# Altium PCB AC-DC-Supply-M1.PcbDoc
Units mil, origin at the board's own origin, x right, y up, seen from the top; angles counter-clockwise.
Board outline 4921.26 x 3937.01 mil, 2 copper layers (Top, Bottom); 58 components, 30 nets, 139 pads, 118 vias.
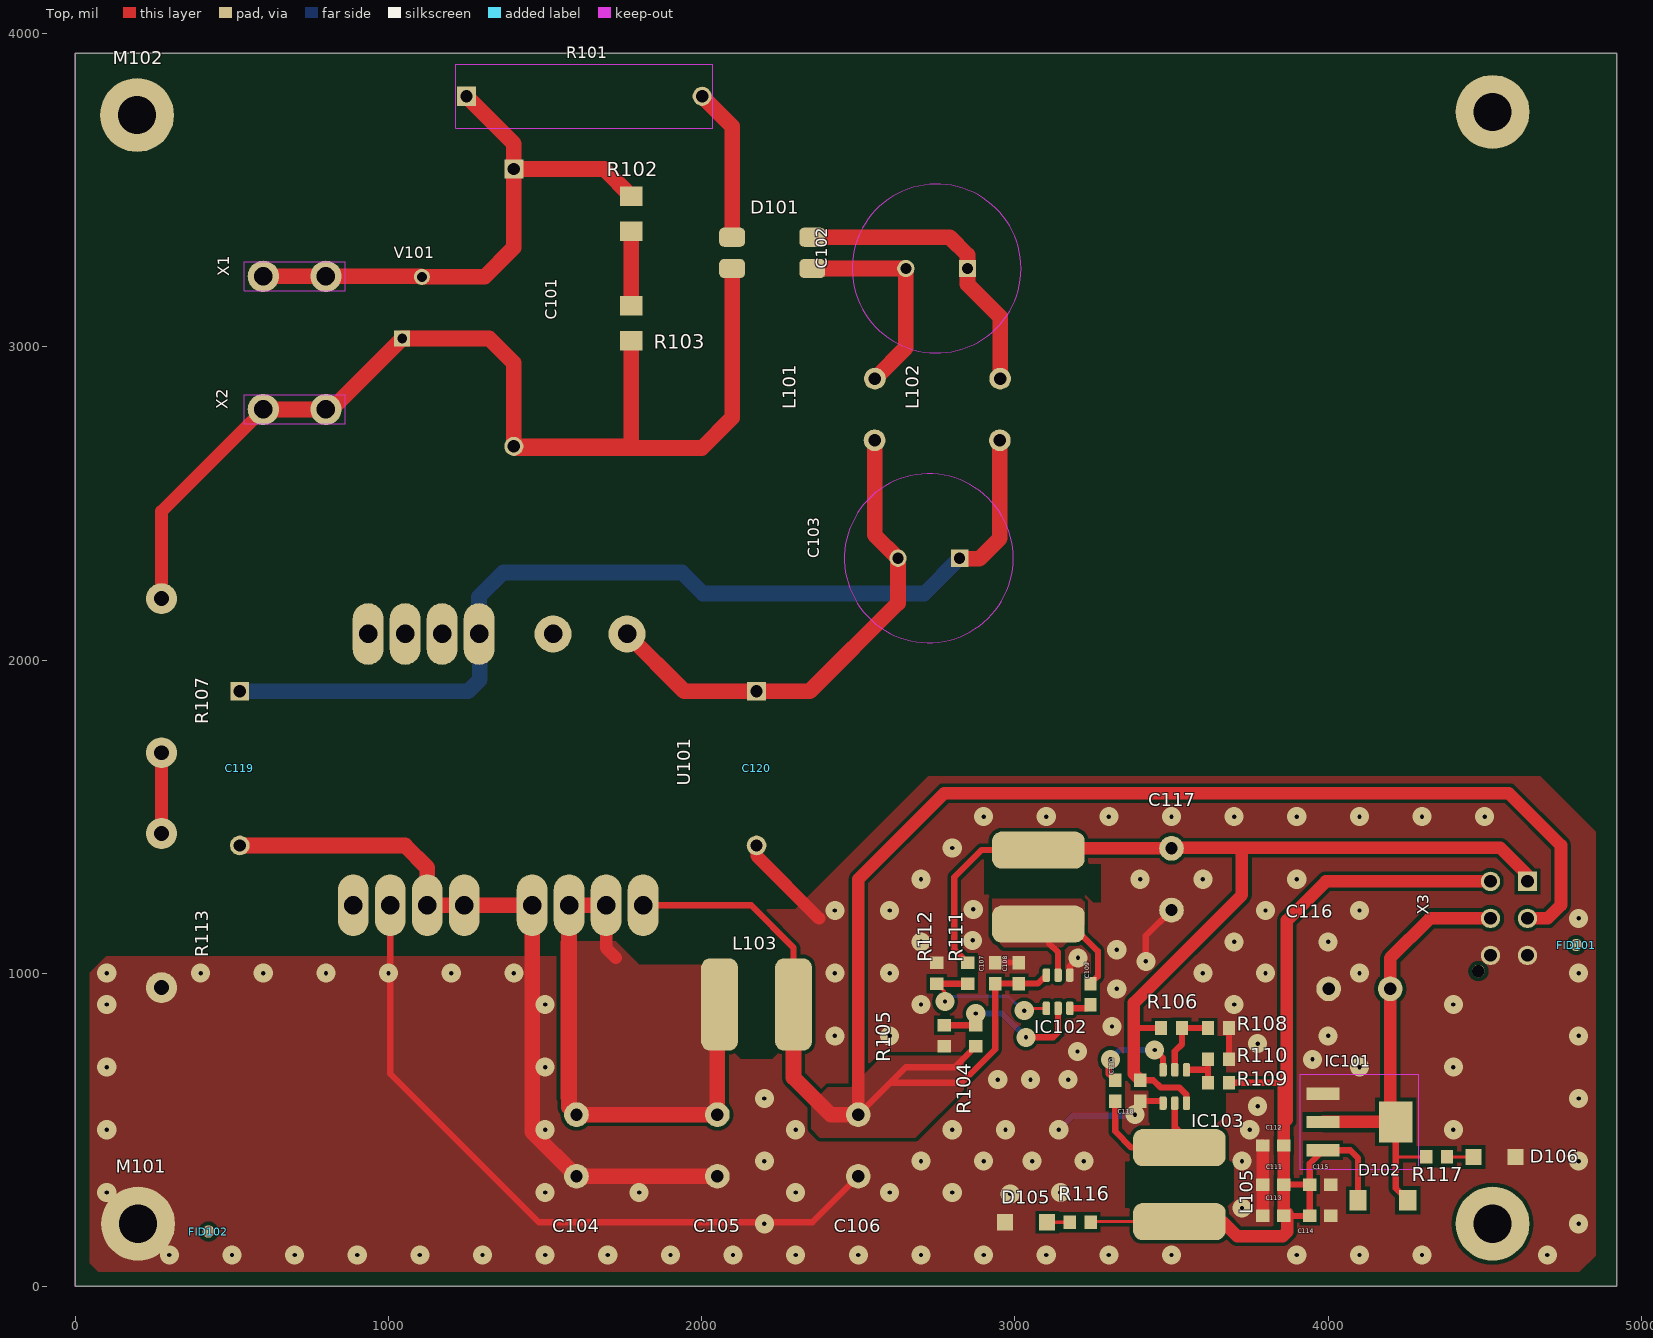
[diagram p0: Top view]
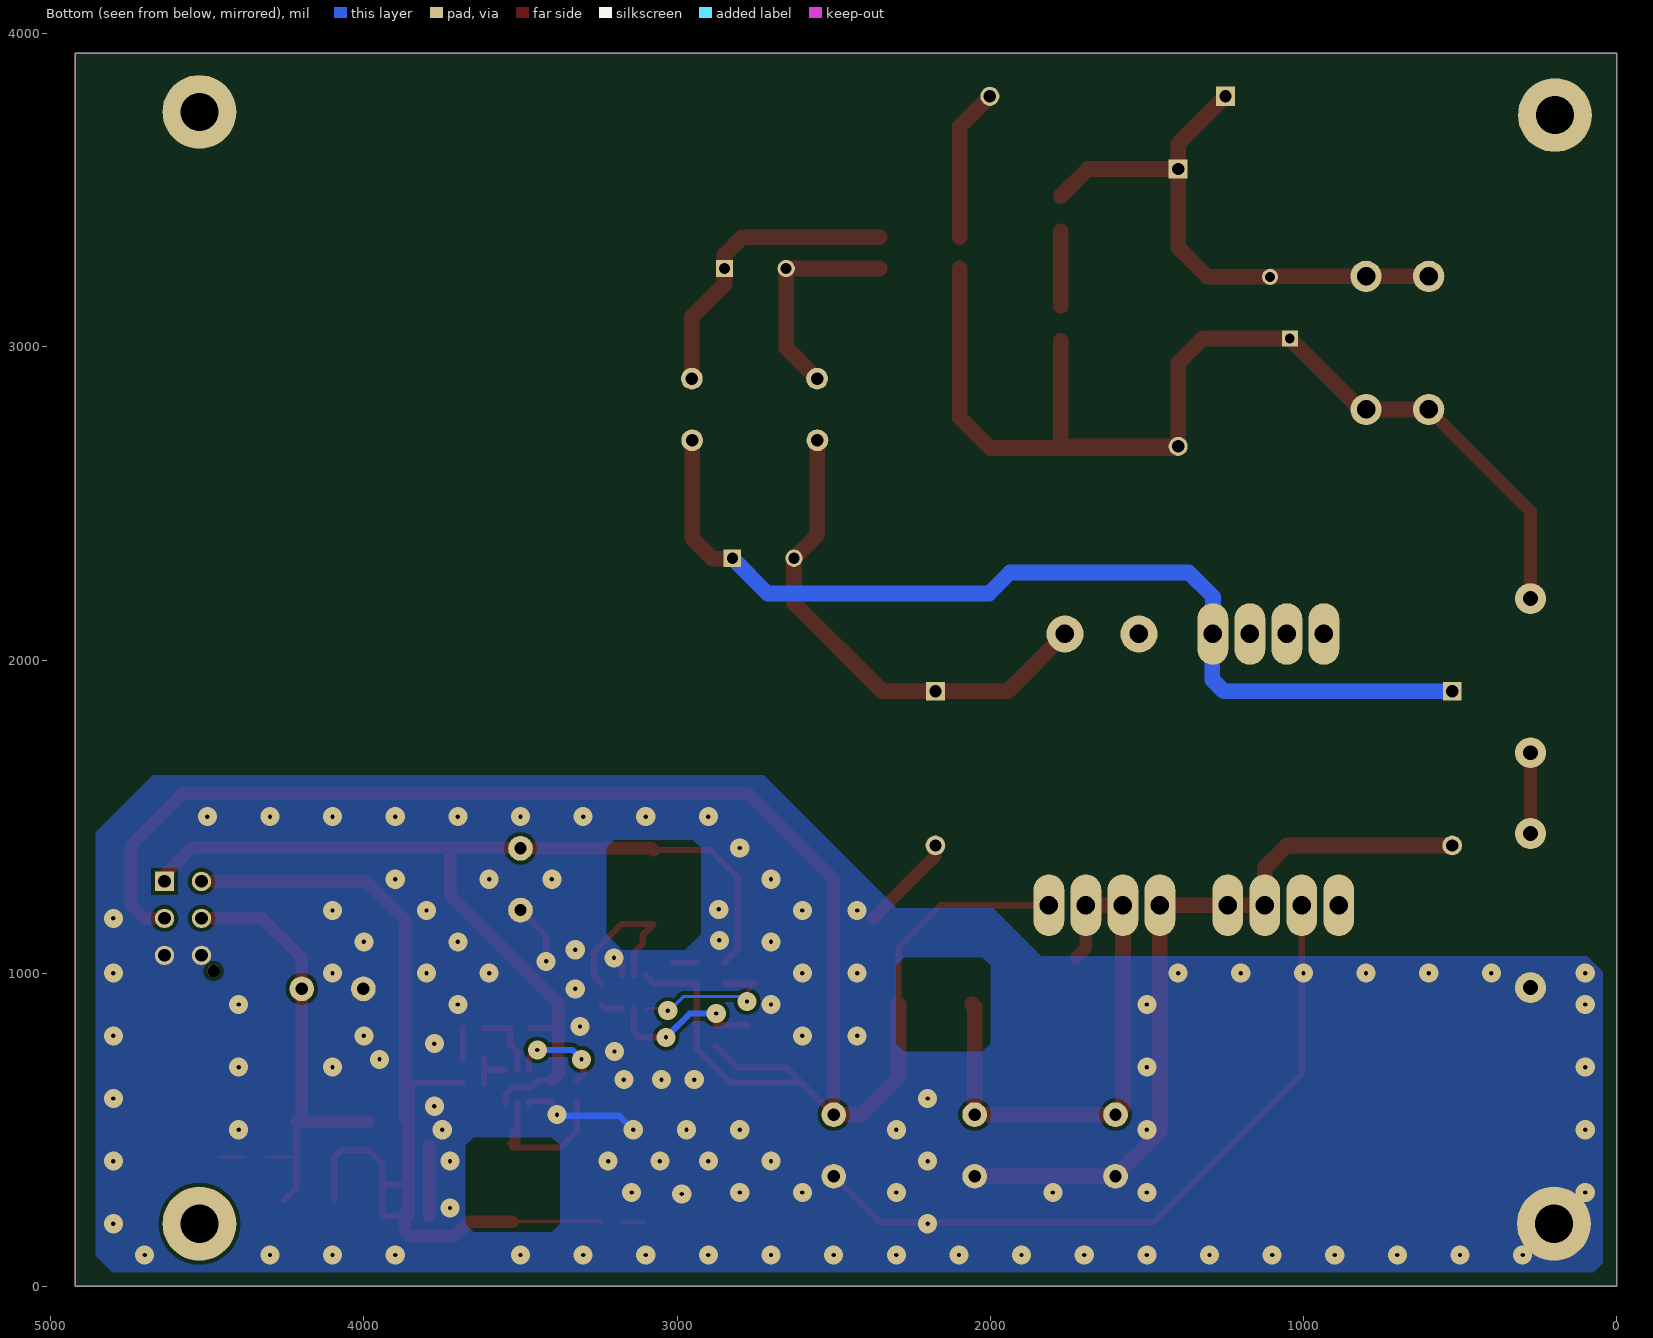
[diagram p1: Bottom view, seen from below]

## Layer stack, top to bottom
Top Solder: solder mask 0.4, Solder Resist, Dk 3.5
Top: signal copper 2.7559
Dielectric 1: dielectric 12.6, FR-4, Dk 4.8
Bottom: signal copper 2.7559
Bottom Solder: solder mask 0.4, Solder Resist, Dk 3.5

## Board outline
0,0 4921.26,0 4921.26,3937.01 0,3937.01

## Design rules (kind name [scope] priority, off if disabled: settings)
BoardOutlineClearance mdCopperDimension [All] p1: gap=10 ignorepadtopadclearanceinfootprint=FALSE except(0: Arc-SplitContinuation Track-SplitContinuation SMDPad-SplitContinuation THPad-SplitContinuation Via-SplitContinuation Fill-SplitContinuation Poly-SplitContinuation Region-SplitContinuation Text-SplitContinuation; 40: Poly-OutlineEdge Poly-CavityEdge Poly-CutoutEdge Poly-SplitBarrior)
Clearance "Clearance (Same Net)" [All] p1: gap=11.81 ignorepadtopadclearanceinfootprint=FALSE except(0: SMDPad-SMDPad SMDPad-THPad SMDPad-Via; 15.75: Track-Via THPad-Via Via-Via)
Clearance [All] p2: gap=11.81 ignorepadtopadclearanceinfootprint=FALSE except(0: Arc-Poly Track-Poly SMDPad-Poly THPad-Poly Via-Poly Fill-Poly Poly-Poly Poly-Region Poly-Text; 15.75: Track-Via THPad-Via Via-Via; 40: Poly-Hole)
HoleSize [All] p1: absolutevalues=TRUE maxlimit=100000 minlimit=11.81 maxpercent=80.000 minpercent=20.000
HoleToHoleClearance mdDrill [All] p1: gap=6 allowstackedmicrovias=TRUE
PasteMaskExpansion mlMinCreamFrame [All] p1: expansion=0
PolygonConnect PolygonConnect_For_PolygonThermal_OFF [InPolygonClass('PolygonThermal_OFF')] p1: connectstyle=Direct reliefconductorwidth=10 reliefentries=4 polygonreliefangle="90 Angle" airgapwidth=10
PolygonConnect ThermalVias [IsVia] p2: connectstyle=Direct reliefconductorwidth=10 reliefentries=4 polygonreliefangle="90 Angle" airgapwidth=10
PolygonConnect [All] p3: connectstyle=Relief reliefconductorwidth=10 reliefentries=4 polygonreliefangle="90 Angle" airgapwidth=10
RoutingVias [All] p1: holewidth=11.81 width=59.05 viastyle="Through Hole" minholewidth=11.81 minwidth=59.05 maxholewidth=100 maxwidth=100
SolderMaskExpansion mlMinStopFrame [All] p1: expansion=4
Width [All] p1: maxlimit=10000 minlimit=7.87 preferedwidth=7.87
27 further rules are at their usual default settings.

## Classes and differential pairs
polygon class PolygonThermal_OFF: Polygon_1_Net_10_AC-DC_SUPPLY:N$9 Polygon_1_Net_10_AC-DC_SUPPLY:N$11 Polygon_1_Net_GND Polygon_1_Net_V_24V0 Polygon_2_Net_GND
polygon class Isolate_0: Polygon_1_Net_10_AC-DC_SUPPLY:N$9 Polygon_1_Net_10_AC-DC_SUPPLY:N$11 Polygon_1_Net_GND Polygon_1_Net_V_24V0 Polygon_2_Net_GND

## Components (designator, comment, footprint, x,y, rotation, side; value= is the part's Value field where it differs from the comment)
C101 "" R49AN347050B1M 1400,3125 r270 top
C102 "" RADIAL_D13.0P5.0H25.0 2750,3250 r180 top
C103 "" RADIAL_D13.0P5.0H25.0 2725,2325 r180 top
C104 "" CAPACITOR-ELKO-RM5-10X16 1600,450 r270 top
C105 "" CAPACITOR-ELKO-RM5-10X16 2050,450 r270 top
C106 "" CAPACITOR-ELKO-RM5-10X16 2500,450 r270 top
C107 "" 0603 2937.6,1000.39 r90 top
C108 "" 0603 3012.6,1000.39 r90 top
C109 "" 0603 3241.34,933.07 r90 top
C110 "" 0603 3320,625 r270 top
C111 "" 0603 3825,325 r0 top
C112 "" 0603 3825,450 r0 top
C113 "" 0603 3825,225 r0 top
C114 "" 0603 3975,225 r180 top
C115 "" 0603 3975,325 r0 top
C116 "" CAPACITOR-ELKO-RM5-10X16 4100,950 r180 top
C117 "" CAPACITOR-ELKO-RM5-10X16 3500,1300 r270 top
C118 "" 0603 3400,625 r90 top
C119 "" CAP-P12.5-H15-W4-D1 525,1900 r270 top
C120 "" CAP-P12.5-H15-W4-D1 2175,1900 r270 top
D101 "MB10S" SOIC4W 2225,3300 r180 top
D102 "" SMA_STTH1L06A 4175,275 r0 top
D105 "" SMD1206-LED 3035.43,204.72 r180 top
D106 "" SMD1206-LED 4531.5,413.39 r0 top
FID101 "" FIDUCIAL 4792.32,1089.96 r0 top
FID102 "" FIDUCIAL 425,175 r0 top
IC101 "" SOT223_LD1117S33TR 4100,525 r0 top
IC102 "" SOT23-6 3137.8,940.94 r180 top
IC103 "" SOT23-6 3510.43,638.15 r0 top
L101 "" THTINDUCTOR8MM7 2550,2800 r270 top
L102 "" THTINDUCTOR8MM7 2950,2800 r270 top
L103 "" SRN8040TA-220M 2175,900 r0 top
L104 "" SRN8040TA-220M 3075,1275 r90 top
L105 "" SRN8040TA-220M 3525,325 r270 top
M101 "" PCB_SCREW_M3_POWER 200,200 r0 top
M102 "" PCB_SCREW_M3_POWER 196.85,3740.16 r0 top
M103 "" PCB_SCREW_M3_POWER 4525,3750 r0 top
M104 "" PCB_SCREW_M3_POWER 4525,200 r0 top
R101 "" ERG-2SJ390V_0 1625,3800 r0 top
R102 "" R1206 1775,3425 r90 top
R103 "" R1206 1775,3075 r90 top
R104 "" R0603 2875,800 r270 top
R105 "" R0603 2775,800 r90 top
R106 "1K 1 %" R0603 3500,825 r180 top
R107 "RNF12FTD10M0" RES-RM12.5-VR37 275,1950 r270 top
R108 "" R0603 3650,825 r180 top
R109 "" R0603 3650,650 r180 top
R110 "" R0603 3650,725 r0 top
R111 "" R0603 2850,1000 r270 top
R112 "" R0603 2750,1000 r270 top
R113 "RNF12FTD10M0" RES-RM12.5-VR37 275,1200 r270 top
R116 "" R0603 3208.66,204.72 r180 top
R117 "" R0603 4346.46,413.39 r0 top
U101 "" BPM2417SJ 1350,1650 r270 top
V101 "" EPCOS_B72205S0271K101_0 1075,3125 r90 top
X1 "" TE_726386-2_MODIFIED 700,3225 r180 top
X2 "" TE_726386-2_MODIFIED 700,2800 r180 top
X3 "" MOLEX_206832-0601 4550,1175 r90 top

## Footprints (in the part's own frame and the unit in brackets; to place one, negate y for a bottom-side part, rotate by r counter-clockwise, add the part's x,y. Pads: shape width x height; smd on the part's side, far side on the other; paste and mask are expansions set on the pad)
0603 [mm] "0603"
  rect 1.1x1 smd: 1(-0.85,0) 2(0.85,0)
  body extent -1.4,-0.5 1.4,0.5, height 3.81
BPM2417SJ [mm] "BPM2417SJ"
  round 3 / inner round 1.524 / far side round 3 hole 1.5: 1(-11,10.45) 2(-11,4.45)
  oval 5x2.5 / inner round 1.524 / far side oval 5x2.5 hole 1.5: 3(-11,-1.55) 4(-11,-4.55) 5(-11,-7.55) 6(-11,-10.55) 07(11,-11.75) 08(11,-8.75) 09(11,-5.75) 10(11,-2.75) 11(11,2.75) 12(11,5.75) 13(11,8.75) 14(11,11.75)
  body extent -11.77,-12.52 11.77,12.52, height 1.27
CAP-P12.5-H15-W4-D1 [mm] "CAP-P12.5-H15-W4-D1"
  rect 1.508x1.508 / inner rect 1.524x1.524 / far side rect 1.508x1.508 hole 1: P$1(0,0)
  round 1.6 / inner round 1.524 / far side round 1.6 hole 1: P$2(12.5,0)
  body extent -0.76,-0.77 13.27,0.77, height 1.27
CAPACITOR-ELKO-RM5-10X16 [mm] "CAPACITOR-ELKO-RM5-10X16"
  round 2 / inner round 1.524 / far side round 2 hole 1: 1(-2.5,0) 2(2.5,0)
  body extent -3.27,-0.77 3.27,0.77, height 1.27
EPCOS_B72205S0271K101_0 [mil] "EPCOS_B72205S0271K101_0"
  rect 51.18x51.18 / inner rect 60x60 / far side rect 51.18x51.18 hole 31.5: 1(-98.43,31.5)
  round 51.18 / inner round 60 / far side round 51.18 hole 31.5: 2(98.43,-31.5)
  body extent -141,-88 141,88, height 150
ERG-2SJ390V_0 [mm] "ERG-2SJ390V_0"
  rect 1.55x1.55 / inner rect 1.524x1.524 / far side rect 1.55x1.55 hole 1: 1(-9.555,0)
  round 1.55 / inner round 1.524 / far side round 1.55 hole 1: 2(9.555,0)
  Top keep-out lines w0.1: -10.43,-2.6 10.43,-2.6 10.43,2.6 -10.43,2.6 -10.43,-2.6
  body extent -10.48,-2.65 10.48,2.65, height 3.81
FIDUCIAL [mm] "FIDUCIAL"
  rrect100% 1x1 smd: P$1(0,0)
  body extent -0.51,-0.51 0.51,0.51, height 1.27
MOLEX_206832-0601 [mil] "MOLEX_206832-0601"
  rect 61.81x61.81 / inner rect 60x60 / far side rect 61.81x61.81 hole 40.16: 1(118.11,-86.61)
  round 61.81 / inner round 60 / far side round 61.81 hole 40.16: 2(118.11,31.5) 3(0,-86.61) 4(0,31.5) 5(-118.11,-86.61) 6(-118.11,31.5)
  round 40.16 hole 40.16 unplated: MH1(-168.5,70.08)
  body extent -202,-176 202,176, height 150
PCB_SCREW_M3_POWER [mm] "PCB_SCREW_M3_POWER"
  round 6 / inner round 1.524 / far side round 6 hole 3.1: 1(0,0)
  body extent -1.56,-1.56 1.56,1.56, height 1.27
R49AN347050B1M [mm] "R49AN347050B1M"
  rect 1.55x1.55 / inner rect 1.524x1.524 / far side rect 1.55x1.55 hole 1: 1(-11.25,0)
  round 1.55 / inner round 1.524 / far side round 1.55 hole 1: 2(11.25,0)
  body extent -13.48,-5.18 13.48,5.18, height 3.81
R0603 [mm] "R0603"
  rect 1x1.1 smd: 1(-0.85,0) 2(0.85,0)
  body extent -1.35,-0.55 1.35,0.55, height 3.81
R1206 [mil] "R1206"
  rect 62.99x70.98 smd: 1(-55.98,0) 2(55.98,0)
  body extent -87,-35 87,35, height 150
RADIAL_D13.0P5.0H25.0 [mil] "RADIAL_D13.0P5.0H25.0"
  rect 55.12x55.12 / inner rect 60x60 / far side rect 55.12x55.12 hole 35.43: 1(-98.43,0)
  round 55.12 / inner round 60 / far side round 55.12 hole 35.43: 2(98.43,0)
  Top keep-out circle w0: c0,0 r269.69
  body extent -270,-270 270,270, height 150
RES-RM12.5-VR37 [mil] "RES-RM12.5-VR37"
  round 98.43 / inner round 60 / far side round 98.43 hole 47.24: 1(-246.06,0) 2(246.06,0)
  body extent -276,-30 276,30, height 50
SMA_STTH1L06A [mm] "SMA_STTH1L06A"
  rect 1.4x1.64 smd: 1(-2.015,0) 2(2.015,0)
  body extent -2.72,-1.53 2.72,1.53, height 3.81
SMD1206-LED [mil] "SMD1206-LED"
  rect 51.18x51.18 smd: 1(-66.93,0) 2(66.93,0)
  body extent -93,-43 93,43, height 150
SOIC4W [mil] "SOIC4W"
  rrect50% 82.68x61.02 smd: 1(-127.95,50) 2(-127.95,-50) 3(127.95,-50) 4(127.95,50)
  body extent -170,-109 170,109, height 150
SOT23-6 [mm] "SOT23-6"
  rrect50% 0.6x1.1 smd: 1(-0.95,-1.35) 2(0,-1.35) 3(0.95,-1.35) 4(0.95,1.35) 5(0,1.35) 6(-0.95,1.35)
  body extent -1.26,-1.91 1.26,1.91, height 1.27
SOT223_LD1117S33TR [mm] "SOT223_LD1117S33TR"
  rect 2.7x1 smd: 1(-2.95,2.3) 2(-2.95,0) 3(-2.95,-2.3)
  rect 2.7x3.3 smd: 4(2.95,0)
  Top keep-out lines w0.1: -4.8,-3.85 4.8,-3.85 4.8,3.85 -4.8,3.85 -4.8,-3.85
  body extent -4.85,-3.9 4.85,3.9, height 3.81
SRN8040TA-220M [mm] "SRN8040TA-220M"
  rrect50% 3x7.5 smd: 1(-3,0) 2(3,0)
  body extent -4.51,-3.76 4.51,3.76, height 1.27
TE_726386-2_MODIFIED [mil] "TE_726386-2_MODIFIED"
  round 100 / inner round 60 / far side round 100 hole 59.06: 1(-100,0) 1-2(100,0)
  Top keep-out lines w3.94: 161.42,46.26 161.42,-46.26 -161.42,-46.26 -161.42,46.26 161.42,46.26
  body extent -164,-48 164,48, height 150
THTINDUCTOR8MM7 [mm] "THTINDUCTOR8MM7"
  round 1.762 / inner round 1.524 / far side round 1.762 hole 1: 1(-2.5,0.075) 2(2.5,0.05)
  body extent -3.27,-0.72 3.27,0.84, height 1.27

## Part data
C101: library part R49AN347050B1M, PackageName=R49AN347050B1M
C102 C103: library part RADIAL_D13.0P5.0H25.0, PackageName=RADIAL_D13.0P5.0H25.0
C104 C105 C106 C116 C117: library part CAPACITOR-ELKO-RM5-10X16, PackageName=CAPACITOR-ELKO-RM5-10X16
C107 C108 C109 C110 C111 C112 C113 C114 C115 C118: library part 0603, PackageName=0603
C119 C120: library part CAP-P12.5-H15-W4-D1, PackageName=CAP-P12.5-H15-W4-D1
D101: library part SOIC4W, PackageName=SOIC4W
D102: library part SMA_STTH1L06A, PackageName=SMA_STTH1L06A
D105 D106: library part SMD1206-LED, PackageName=SMD1206-LED
FID101 FID102: library part FIDUCIAL, PackageName=FIDUCIAL
IC101: library part SOT223_LD1117S33TR, PackageName=SOT223_LD1117S33TR
IC102 IC103: library part SOT23-6, PackageName=SOT23-6
L101 L102: library part THTINDUCTOR8MM7, PackageName=THTINDUCTOR8MM7
L103 L104 L105: library part SRN8040TA-220M, PackageName=SRN8040TA-220M
M101 M102 M103 M104: library part PCB_SCREW_M3_POWER, PackageName=PCB_SCREW_M3_POWER
R101: library part ERG-2SJ390V_0, PackageName=ERG-2SJ390V_0
R102 R103: library part R1206, PackageName=R1206
R104 R105 R106 R108 R109 R110 R111 R112 R116 R117: library part R0603, PackageName=R0603
R107 R113: library part RES-RM12.5-VR37, PackageName=RES-RM12.5-VR37
U101: library part BPM2417SJ, PackageName=BPM2417SJ
V101: library part EPCOS_B72205S0271K101_0, PackageName=EPCOS_B72205S0271K101_0
X1 X2: library part TE_726386-2_MODIFIED, PackageName=TE_726386-2_MODIFIED
X3: library part MOLEX_206832-0601, PackageName=MOLEX_206832-0601

## Via types
v1: diameter 61.02/61.02 (per signal layer), hole 13.78, Top to Bottom, tented both sides, 118 vias

## Nets (pads, with @x,y where several pads share a name; then routed paths per layer and width w, separated by ;. In a path a pad name is that pad's centre, name@x,y a point inside that pad or via, vN(x,y) a via of type N, cw(c..) or ccw(c..) an arc to the next point about the centre after c; other vN are vias at no path point)
10_AC-DC_SUPPLY:N$1: IC102.4 R111.2 R112.2 | length 522
  Top w10: R112.2 2775.59,940.94 2775.59,910.63 v1(2776.77,909.45) ; v1(3029.94,880.33) 3037.4,887.8 IC102.4
  Top w20: R112.2 R111.2
  Bottom w10: v1(2776.77,909.45) 2792.52,925.2 2980.32,925.2 3027.56,877.95 v1(3029.94,880.33)
10_AC-DC_SUPPLY:N$2: R102.1 R103.2 | length 238
  Top w50: R103.2 R102.1
10_AC-DC_SUPPLY:N$3: R107.2 R113.1 | length 257.9
  Top w40: R113.1 R107.2
10_AC-DC_SUPPLY:N$4: D101.3 R101.2 | length 489.7
  Top w50: R101.2 2097.05,3704.13 D101.3
10_AC-DC_SUPPLY:N$5: C102.2 D101.1 L101.1 | length 691
  Top w50: D101.1 C102.2 2651.57,2997.05 L101.1
10_AC-DC_SUPPLY:N$6: C102.1 D101.2 L102.1 | length 957.1
  Top w50: D101.2 2791.73,3350 2848.43,3293.31 C102.1 2848.43,3200 2952.95,3095.47 L102.1
10_AC-DC_SUPPLY:N$7: C103.2 C120.P$1 L101.2 U101.1 | length 1608.4
  Top w50: U101.1 1944.49,1900 C120.P$1 2344.88,1900 2626.57,2181.69 C103.2 2551.97,2399.61 L101.2
10_AC-DC_SUPPLY:N$8: C103.1 C119.P$1 L102.2 U101.3 | length 3158.1
  Top w50: C103.1 2825.59,2322.83 2885.83,2322.83 2951.97,2388.98 L102.2
  Bottom w50: C119.P$1 1254.33,1900 1291.34,1937.01 1291.34,2080.71 U101.3 1288.98,2202.36 1366.14,2279.53 1937.01,2279.53 2003.94,2212.6 2711.02,2212.6 C103.1
10_AC-DC_SUPPLY:N$9: C109.2 IC102.2 | length 527.8
  Top w20: IC102.2 3137.8,1066.69 3110,1094.49 3110,1121.89 3075,1156.89 3177.76,1156.89 3264.96,1069.69 3264.96,990.16 C109.2
10_AC-DC_SUPPLY:N$10: IC102.5 R104.1 R105.2 | length 515.1
  Top w20: R105.2 R104.1 v1(2875,871.06) ; v1(3035.43,795.28) 3122.05,795.28 3137.8,811.02 IC102.5
  Bottom w20: v1(2875,871.06) 2959.65,871.06 v1(3035.43,795.28)
10_AC-DC_SUPPLY:N$11: C104.1 C105.1 L103.1 U101.12 U101.13 | length 1780.4
  Top w40: U101.13 1694.49,1080.51 1725,1050
  Top w50: U101.13 U101.12 1576.38,572.05 C104.1 C105.1 2050,893.11 L103.1
10_AC-DC_SUPPLY:N$12: C109.1 IC102.6 | length 71
  Top w20: IC102.6 3229.53,887.8 C109.1
10_AC-DC_SUPPLY:N$13: C110.2 IC103.2 L105.1 | length 544.5
  Top w10: L105.1 L105.1@3540,458.11
  Top w20: C110.2 3320,495 3371.89,443.11 L105.1 3525,495.43 3510.43,510 ; L105.1@3510.43,457.68 3510.43,510 ; IC103.2 3510.43,510
10_AC-DC_SUPPLY:N$15: IC103.4 R109.2 R110.1 | length 144.2
  Top w20: IC103.4 3615.24,691.3 3616.54,690 ; R109.2 3616.54,690 ; R110.1 3616.54,690
10_AC-DC_SUPPLY:N$16: IC103.5 R106.1 R108.2 | length 226.3
  Top w20: IC103.5 3510.43,750.43 3533.46,773.46 R106.1 R108.2
10_AC-DC_SUPPLY:N$17: D105.1 R116.2 | length 72.8
  Top w10: D105.1 R116.2
10_AC-DC_SUPPLY:N$19: D106.1 R117.2 | length 84.6
  Top w10: R117.2 D106.1
10_AC-DC_SUPPLY:N$21: C110.1 IC103.6 | length 305.4
  Top w20: v1(3305,725) 3300,720 3300,678.46 C110.1 ; v1(3446.26,755) 3473.03,728.23 IC103.6
  Bottom w20: v1(3305,725) 3335,755 v1(3446.26,755)
COIL2-CUTOUT: 
COIL_CUTOUT: 
COIL_CUTOUT_BOT: 
CUTOUT02: 
CUTOUT_COIL3: 
GND: C104.2 C105.2 C106.2 C107.2 C108.2 C111.1 C112.1 C113.1 C114.1 C115.2 C116.2 C117.2 C118.1 C119.P$2 C120.P$2 D105.2 D106.2 IC101.1 IC102.1 IC103.1 M101.1 R105.1 R108.1 R110.2 R112.1 R113.2 U101.08 U101.09 U101.10 U101.11 X3.5 X3.6 | length 6114.3
  Top w20: U101.08 1005.51,679.49 1480,205 2353.43,205 C106.2 ; C107.2@2937.6,1033.86 C108.2@3012.6,1033.86 ; IC102.1 3175.2,1022.44 v1(3201.57,1048.82) ; v1(3383.65,548.43) 3383.65,568.65 3400,585 C118.1 3466.5,591.54 IC103.1 ; v1(3418.11,1037.8) 3418.11,1119.69 C117.2 ; R110.2 R108.1
  Top w40: C120.P$2 2175,1375 2375,1175 ; C113.1 C112.1
  Top w50: C119.P$2 1052.76,1407.87 1123.62,1337.01 U101.09 U101.10 U101.11 1458.27,493.31 C104.2 C105.2
  Bottom w20: v1(3140,500) 3185,545 3380.22,545 v1(3383.65,548.43)
  other v1: 300,100 500,100 700,100 900,100 1100,100 1300,100 1500,100 1700,100 1900,100 2100,100 2300,100 2500,100 2700,100 2900,100 3100,100 3300,100 3500,100 3900,100 4100,100 4300,100 4700,100 2200,200 4800,200 3725,250 2985,295 100,300 1500,300 1800,300 2300,300 2600,300 2800,300 3145,300 2200,400 2700,400 2900,400 3055,400 3220,400 3725,400 4800,400 100,500 1500,500 2300,500 2800,500 2970,500 3750,500 4400,500 3775,575 2200,600 4800,600 2945,660 3050,660 3170,660 100,700 1500,700 4100,700 4400,700 3950,725 3200,750 3775,775 2425,800 2600,800 4000,800 4800,800 3310,830 100,900 1500,900 2700,900 3700,900 4400,900 3325,950 100,1000 400,1000 600,1000 800,1000 1000,1000 1200,1000 1400,1000 2425,1000 2600,1000 3600,1000 3800,1000 4100,1000 4800,1000 3325,1075 2700,1100 3700,1100 4000,1100 2865,1105 4800,1175 2425,1200 2600,1200 3800,1200 4100,1200 2866.93,1203.94 2700,1300 3400,1300 3600,1300 3900,1300 2800,1400 2900,1500 3100,1500 3300,1500 3500,1500 3700,1500 3900,1500 4100,1500 4300,1500 4500,1500
N$1: C101.1 R101.1 R102.2 V101.2 X1.1 X1.1-2 | length 1796.1
  Top w50: X1.1-2 X1.1 1104.92,3225 V101.2 1306.5,3223.43 1400,3316.93 C101.1 ; R101.1 1400,3648.82 C101.1 ; R102.2 1688.07,3567.91 C101.1
N$2: C101.2 D101.4 R103.1 R107.1 V101.1 X2.1 X2.1-2 | length 3858.2
  Top w40: R107.1 275,2475 X2.1-2
  Top w50: X2.1-2 X2.1 816.93,2800 V101.1 1321.65,3026.57 1400,2948.23 C101.2 ; R103.1 1775,2682.09 C101.2 ; D101.4 2097.05,2773.82 2000.39,2677.17 1404.92,2677.17 C101.2
V_3V3: C116.1 D102.2 IC101.2 IC101.4 R117.1 X3.4 | length 1499.8
  Top w10: 4216.14,409.45 4220.08,413.39 R117.1
  Top w20: IC101.4 4216.14,409.45 4216.14,313.19 D102.2
  Top w40: IC101.2 IC101.4 4198.43,542.72 C116.1 4198.43,1048.43 4325,1175 X3.4
V_5V0: C111.2 C112.2 C113.2 C114.2 C115.1 D102.1 IC101.3 L105.2 R109.1 R116.1 X3.2 | length 3330.3
  Top w10: R116.1 3244.29,206.89 L105.2 ; C113.2 3866.93,233.46 C113.2@3870,233.46
  Top w20: R109.1 3858.46,650 ; C113.2 C114.2 C115.1 ; C111.2 C115.1 ; D102.1 4095.67,409.33 4070.55,434.45 IC101.3 3941.54,392.13 C115.1
  Top w40: L105.2 3663.11,206.89 3710,160 3855,160 3870,175 C113.2@3870,233.46 ; C113.2 C111.2 C112.2 3858.46,541.54 ; 3858.46,650 3858.46,541.54 ; X3.2 3993.11,1293.11 3868.46,1168.46 3868.46,531.54 3858.46,541.54
V_12V0: C117.1 C118.2 IC103.3 R106.2 R111.1 X3.1 | length 3389.3
  Top w20: R111.1 2806.69,1076.77 2806.69,1306.69 2893.11,1393.11 3075,1393.11 ; 3380,825 R106.2 ; C118.2 3441.54,658.46 3465,635 3525,635 3547.83,612.17 IC103.3
  Top w40: 3075,1393.11 3080.32,1398.43 C117.1 3501.57,1400 3725,1400 ; C118.2 3380,678.46 3380,825 3380,905 3725,1250 3725,1400 ; X3.1 4636.61,1313.39 4550,1400 3725,1400
V_24V0: C106.1 C107.1 C108.1 IC102.3 L103.2 R104.2 U101.14 X3.3 | length 6074.1
  Top w20: U101.14 2158.07,1216.93 2293.11,1081.89 L103.2 ; R104.2 2808.46,700 2651.57,700 C106.1 2601.57,650 2830.71,650 2937.6,756.89 C107.1 C108.1 3073.23,966.93 IC102.3
  Top w40: C106.1 2500,1300 2775,1575 4576.57,1575 4743.7,1407.87 4743.7,1217.72 4700.98,1175 X3.3
  Top w50: L103.2 2293.11,666.89 2411.57,548.43 C106.1
pads on no net: FID101.P$1 FID102.P$1 L104.1 L104.2 M102.1 M103.1 M104.1 U101.2 U101.4 U101.5 U101.6 U101.07 X3.MH1

## Polygon pours and split planes (outlines as drawn)
10_AC-DC_SUPPLY:N$9 on Top "Polygon_1_Net_10_AC-DC_SUPPLY:N$9" (solid, remove dead copper, pour order 0): 3151.04,1082.5 2963.96,1082.5 2927.5,1118.96 2927.5,1237.5 3211.04,1237.5 3222.5,1226.04 3222.5,1153.96
10_AC-DC_SUPPLY:N$11 on Top "Polygon_1_Net_10_AC-DC_SUPPLY:N$11" (solid, remove dead copper, pour order 2): 1547.5,1102.5 1726.04,1102.5 1801.04,1027.5 2001.04,1027.5 2052.5,976.04 2052.5,700 2052.5,598.96 2001.04,547.5 1598.96,547.5 1547.5,598.96
V_24V0 on Top "Polygon_1_Net_V_24V0" (solid, remove dead copper, pour order 1): 2402.51,636 2349,582.49 2349,502.51 2377.51,474 2682.49,474 2836,627.51 2836,736 2577.51,736 2477.51,636
GND on Top "Polygon_1_Net_GND" (solid, remove dead copper, pour order 4): 46,73.34 73.34,46 775,46 4801.66,46 4854,98.34 4854,1451.66 4676.66,1629 2723.34,1629 2298.34,1204 2048.34,1204 1898.34,1054 98.34,1054 46,1001.66
GND on Bottom "Polygon_2_Net_GND" (solid, remove dead copper, pour order 3): 44.74,1004.98 44.74,73.76 73.76,44.74 4804.19,44.74 4856.83,97.39 4856.83,1449.86 4674.27,1632.42 2723.37,1632.42 2298.17,1207.22 1991.09,1207.22 1837.54,1053.68 93.45,1053.68

## Keep-outs
Keep-Out Layer:
  the board outline again, w0

## Other copper
Top:
  pour cut-out net CUTOUT02: 3650,800 3425,800 3425,525 3450,500 3625,500 3650,525 3675,550 3675,800 3650,800
  pour cut-out net CUTOUT_COIL3: 3350,400 3350,250 3675,250 3700,275 3700,400 3350,400
  pour cut-out net COIL2-CUTOUT: 2100,1050 2125,1075 2150,1075 2225,1075 2250,1050 2250,750 2225,725 2125,725 2100,750 2100,1050
  pour cut-out net COIL_CUTOUT: 2900,1375 2900,1250 3225,1250 3250,1225 3275,1225 3275,1350 3225,1350 3200,1325 2950,1325 2925,1350 2925,1375 2900,1375
Bottom:
  pour cut-out net COIL_CUTOUT_BOT: 3475,475 3400,475 3375,450 3375,200 3400,175 3650,175 3675,200 3675,450 3650,475 3475,475
  pour cut-out net COIL_CUTOUT_BOT: 2925,1225 2925,1125 2975,1075 3175,1075 3225,1125 3225,1400 3200,1425 2950,1425 2925,1400 2925,1225
  pour cut-out net COIL_CUTOUT_BOT: 2100,1050 2025,1050 2000,1025 2000,775 2025,750 2275,750 2300,775 2300,1025 2275,1050 2100,1050

## Silkscreen, mask and mechanical layers (free items; w line width, h text height)
Dimension:
  the board outline again, w0
Top Assembly:
  circle w10: c4700,900 r25
  lines w10: 4700,725 4400,725 ; 4400,600 4700,600 ; 4400,600 4400,475 4550,475 ; 4400,600 4400,725 ; 4400,725 4400,850 4550,850 ; 4550,475 4550,850 ; 4550,475 4700,475 4700,600 ; 4550,850 4700,850 4700,600
  text "AC-DC-Supply-M1" at 3822.83,3334.65 h108.5
  text "HW01.01" at 3822.83,3216.54 h108.5
  text "Mains_L" at 250,3200 h62
  text "Mains_N" at 250,2800 h62
  text "5V" at 4425,775 h62
  text "12V" at 4575,775 h62
  text "3.3V" at 4425,650 h62
  text "24V" at 4575,650 h62
  text "GND" at 4425,525 h62
  text "GND" at 4575,525 h62

## Text inside footprints (layer, text, board x,y; h text height)
C104: Top Assembly "+" at 1560.63,653.74 h66.93 r270
C105: Top Assembly "+" at 2010.63,653.74 h66.93 r270
C106: Top Assembly "+" at 2460.63,653.74 h66.93 r270
C116: Top Assembly "+" at 4303.74,989.37 h66.93 r180
C117: Top Assembly "+" at 3460.63,1503.74 h66.93 r270
D105: Top Assembly "A" at 3122.36,164.72 h16.74 r180; Top Assembly "K" at 2957.36,169.72 h16.74 r180
D106: Top Assembly "A" at 4444.57,453.39 h16.74; Top Assembly "K" at 4609.57,448.39 h16.74